# EAGLE board Half_adder (EAGLE 9.7.0)

Size 103.51 x 59.22 mm. Coordinates in mm from the lower left corner, seen from the top.
Outline: 0,0 103.51,0 103.51,59.22 0,59.22 0,0
Copper layers (1*16): Top 0.035mm / dielectric 1.5mm / Bottom 0.035mm
Design rules "default": minimum track width 6mil, minimum drill 0.35mm, track to track 6mil, track to pad 6mil, pad to pad 6mil, via to via 6mil, smd to smd 6mil, copper to edge 40mil, drill to drill 6mil, minimum pad ring 10mil, minimum via ring 8mil, stop-mask expansion 4mil, vias tented up to drill 0mil, thermal gap 10mil

## Footprints (pad centres in the part's own frame; a part is rotated, then mirrored left to right if it is on the bottom)
LEDRD254W60D565H860B = drill 0.981 pad 1.581: 1 -1.27,0; 2 1.27,0
BATTERY-GENERIC = drill 1.118 pad 3.15 octagon: + 2.54,0; - -2.54,0
RESAD1016W63L850D250B = drill 0.83 pad 1.43: 1 -5.08,0; 2 5.08,0
78B04ST = drill 0.8: 1 -3.81,-3.81; 2 -1.27,-3.81; 3 1.27,-3.81; 4 3.81,-3.81; 5 3.81,3.81; 6 1.27,3.81; 7 -1.27,3.81; 8 -3.81,3.81
DIP762W53P254L1969H508Q14B = drill 0.743 pad 1.343: 1 -3.81,7.62; 2 -3.81,5.08; 3 -3.81,2.54; 4 -3.81,0; 5 -3.81,-2.54; 6 -3.81,-5.08; 7 -3.81,-7.62; 8 3.81,-7.62; 9 3.81,-5.08; 10 3.81,-2.54; 11 3.81,0; 12 3.81,2.54; 13 3.81,5.08; 14 3.81,7.62

## Placement (x,y rotation side)
DC  RED  [LEDRD254W60D565H860B]  90.83,34.1 180 top
DS  RED  [LEDRD254W60D565H860B]  95.91,34.1 180 top
P2  BATTERYGENERIC  [BATTERY-GENERIC]  8.85,50.97 270 top
R1  1k  [RESAD1016W63L850D250B]  92.1,26.48 90 top
R3  1k  [RESAD1016W63L850D250B]  97.18,26.48 90 top
SW2  SPST-478B04ST  [78B04ST]  9.27,9.53 0 top
UAND  74HC08_PDIP  [DIP762W53P254L1969H508Q14B]  74.32,27.75 90 top
UXOR  74HC86_PDIP  [DIP762W53P254L1969H508Q14B]  46.38,27.75 90 top

## Library data of the parts
DC DS = Tinkercad; CATEGORY: Opto-Electronic; SUB-CATEGORY: LED; VALUE: LED_RED
P2 R1 R3 SW2 UAND UXOR = Tinkercad

## Nets
DC_A: DC.1 R1.2
DS_A: DS.1 R3.2
P2+: P2.+ SW2.1 SW2.2 UAND.14 UXOR.14
P2-: DC.2 DS.2 P2.- UAND.7 UXOR.7
UAND_1Y: R1.1 UAND.3
UXOR_1A: SW2.8 UAND.1 UXOR.1
UXOR_1B: SW2.7 UAND.2 UXOR.2
UXOR_1Y: R3.1 UXOR.3

## Tracks (layer width: path | path; a pad name or v marks a point on that pad's centre or on a via)
DC_A  (1 unrouted)
DS_A  (1 unrouted)
P2+  (4 unrouted)
P2-  (4 unrouted)
UAND_1Y  (1 unrouted)
UXOR_1A  (2 unrouted)
UXOR_1B  (2 unrouted)
UXOR_1Y  (1 unrouted)